# EAGLE board CT_schematic (EAGLE 7.6.0)

Size 100 x 80 mm. Coordinates in mm from the lower left corner, seen from the top.
Outline: 0,0 100,0 100,80 0,80 0,0
Copper layers (1*16): Top 0.035mm / dielectric 1.5mm / Bottom 0.035mm
Design rules "default": minimum track width 10mil, minimum drill 24mil, track to track 8mil, track to pad 8mil, pad to pad 8mil, via to via 8mil, smd to smd 8mil, copper to edge 40mil, drill to drill 8mil, minimum pad ring 10mil, minimum via ring 8mil, stop-mask expansion 4mil, vias tented up to drill 0mil, thermal gap 10mil

## Footprints (pad centres in the part's own frame; a part is rotated, then mirrored left to right if it is on the bottom)
C0603 = smd 0.8 x 0.8: 1 -0.762,0; 2 0.762,0
C0402 = smd 0.5 x 0.5: 1 -0.508,0; 2 0.508,0
C1210 = smd 1.2 x 2.5: 1 -1.524,0; 2 1.524,0
C0805 = smd 1.2 x 1.3: 1 -1.016,0; 2 1.016,0
R0603 = smd 0.8 x 0.8: 1 -0.762,0; 2 0.762,0
EXV-9H = smd 3.505 x 1.676: 1 -2.857,0; 2 2.857,0
L0603 = smd 0.8 x 0.8: 1 -0.762,0; 2 0.762,0
PJ-037B_PACKAGE = drill 3.7 square: 1 12,0 | drill 3.2 square: 2 6,0
EWLCSP66 = smd 0.27 x 0.27: A1 0,0; A2 0.4,0; A3 0.8,0; A4 1.2,0; A5 1.6,0; A6 2,0; A7 2.4,0; A8 2.8,0; A9 3.2,0; B1 0,-0.4; B2 0.4,-0.4; B3 0.8,-0.4; B4 1.2,-0.4; B5 1.6,-0.4; B6 2,-0.4; B7 2.4,-0.4; B8 2.8,-0.4; B9 3.2,-0.4; C1 0,-0.8; C2 0.4,-0.8; C3 0.8,-0.8; C7 2.4,-0.8; C8 2.8,-0.8; C9 3.2,-0.8; D1 0,-1.2; D2 0.4,-1.2; D3 0.8,-1.2; D7 2.4,-1.2; D8 2.8,-1.2; D9 3.2,-1.2; E1 0,-1.6; E2 0.4,-1.6; E3 0.8,-1.6; E7 2.4,-1.6; E8 2.8,-1.6; E9 3.2,-1.6; F1 0,-2; F2 0.4,-2; F3 0.8,-2; F7 2.4,-2; F8 2.8,-2; F9 3.2,-2; G1 0,-2.4; G2 0.4,-2.4; G3 0.8,-2.4; G7 2.4,-2.4; G8 2.8,-2.4; G9 3.2,-2.4; H1 0,-2.8; H2 0.4,-2.8; H3 0.8,-2.8; H4 1.2,-2.8; H5 1.6,-2.8; H6 2,-2.8; H7 2.4,-2.8; H8 2.8,-2.8; H9 3.2,-2.8; J1 0,-3.2; J2 0.4,-3.2; J3 0.8,-3.2; J4 1.2,-3.2; J5 1.6,-3.2; J6 2,-3.2; J7 2.4,-3.2; J8 2.8,-3.2; J9 3.2,-3.2
SOIC-8 = smd 1.6 x 0.6: 1 -2.7,1.905 | smd 1.55 x 0.6: 2 -2.7,0.635; 3 -2.7,-0.635; 4 -2.7,-1.905; 5 2.7,-1.905; 6 2.7,-0.635; 7 2.7,0.635; 8 2.7,1.905
SAMTEC_FTSH-105-01-L-DV-K = smd 0.762 x 2.794: 1 -2.54,-2.032; 2 -2.54,2.032; 3 -1.27,-2.032; 4 -1.27,2.032; 5 0,-2.032; 6 0,2.032; 7 1.27,-2.032; 8 1.27,2.032; 9 2.54,-2.032; 10 2.54,2.032
182-009-MALE = drill 1.194 pad 1.524 octagon: 1 -5.537,10.923; 2 -2.769,10.923; 3 0,10.923; 4 2.769,10.923; 5 5.537,10.923; 6 -4.153,8.08; 7 -1.384,8.08; 8 1.384,8.08; 9 4.153,8.08 | hole 3.048: -12.446,9.501; 12.446,9.501
QFN-24 = smd 0.7 x 0.305: 1 -1.815,1.25; 2 -1.815,0.75; 3 -1.815,0.25; 4 -1.815,-0.25; 5 -1.815,-0.73; 6 -1.815,-1.25; 13 1.815,-1.25; 14 1.815,-0.75; 15 1.815,-0.25; 16 1.815,0.25; 17 1.815,0.75; 18 1.815,1.25 | smd 0.305 x 0.7: 7 -1.25,-1.815; 8 -0.75,-1.815; 9 -0.25,-1.815; 10 0.25,-1.815; 11 0.75,-1.815; 12 1.25,-1.815; 19 1.25,1.815; 20 0.75,1.815; 21 0.25,1.815; 22 -0.25,1.815; 23 -0.75,1.815; 24 -1.25,1.815 | smd 2.591 x 2.591: 25 0,0
FCI_10118193-0001LF = smd 0.4 x 1.35: 1 -1.3,2.675; 2 -0.65,2.675; 3 0,2.675; 4 0.65,2.675; 5 1.3,2.675 | smd 1.6 x 1.4: 6 -3.2,2.45; 7 3.2,2.45 | smd 1.9 x 1.9: 8 -1.2,0; 9 1.2,0 | hole 0.5: -3.3,0; 3.3,0
SOT143B = smd 1 x 0.7: 1 -0.75,-1 | smd 0.6 x 0.7: 2 0.95,-1; 3 0.95,1; 4 -0.95,1
ASEK = smd 1.4 x 1: 1 -1.1,-0.8; 2 1.1,-0.8; 3 1.1,0.8; 4 -1.1,0.8
ASFL1 = smd 1.7 x 1.5: 1 -1.27,-1.1; 2 1.27,-1.1; 3 1.27,1.1; 4 -1.27,1.1
WSON-8 = smd 0.3 x 0.6: 1 -0.75,0; 2 0.05,0; 3 0.85,0; 4 1.65,0; 5 1.65,3.8; 6 0.85,3.8; 7 0.05,3.8; 8 -0.75,3.8 | smd 3 x 2.6: PAD 0.45,1.9
SON-6 = smd 0.55 x 0.3: 1 -0.355,0.5 | smd 0.52 x 0.3: 2 -0.37,0; 3 -0.37,-0.5; 4 0.37,-0.5; 5 0.37,0; 6 0.37,0.5
SW_4-1437565-2 = smd 1.4 x 2.1: 1 -2.23,4.55; 2 -2.23,-4.55; 3 2.23,4.55; 4 2.23,-4.55
LGM67K-G1J2-24-Z = smd 0.8 x 1.4: A -2,0; C 0,0
NC7SZ125M5X = smd 1.3 x 0.7: 1 -1.3,0.95; 2 -1.3,0; 3 -1.3,-0.95; 4 1.3,-0.95; 5 1.3,0.95

## Placement (x,y rotation side)
C1  1e-06  [C0603]  -22.86,77.47 0 top  (outside the outline)
C2  1e-07  [C0603]  -26.67,77.47 0 top  (outside the outline)
C3  1e-07  [C0603]  -30.48,77.47 0 top  (outside the outline)
C4  1e-07  [C0603]  -34.29,77.47 0 top  (outside the outline)
C5  1e-07  [C0603]  -38.1,77.47 0 top  (outside the outline)
C6  1e-07  [C0603]  -41.91,77.47 0 top  (outside the outline)
C7  4.7e-06  [C0603]  -15.24,77.47 0 top  (outside the outline)
C8  1e-08  [C0603]  -45.72,77.47 0 top  (outside the outline)
C9  1e-06  [C0603]  -49.53,77.47 0 top  (outside the outline)
C10  1e-07  [C0402]  -38.1,82.55 0 top  (outside the outline)
C11  1e-07  [C0402]  -41.91,82.55 0 top  (outside the outline)
C12  1e-08  [C0402]  -45.72,82.55 0 top  (outside the outline)
C13  1e-07  [C0402]  -49.53,82.55 0 top  (outside the outline)
C14  1e-07  [C0402]  -53.34,82.55 0 top  (outside the outline)
C15  1e-08  [C0402]  -57.15,82.55 0 top  (outside the outline)
C16  2.2e-06  [C0603]  -19.05,77.47 0 top  (outside the outline)
C17  1e-08  [C0402]  -60.96,82.55 0 top  (outside the outline)
C18  1e-08  [C0402]  -64.77,82.55 0 top  (outside the outline)
C19  1e-06  [C0603]  -53.34,77.47 0 top  (outside the outline)
C20  1e-08  [C0402]  -68.58,82.55 0 top  (outside the outline)
C21  1e-08  [C0402]  -72.39,82.55 0 top  (outside the outline)
C22  1e-08  [C0402]  -76.2,82.55 0 top  (outside the outline)
C23  1e-08  [C0402]  -80.01,82.55 0 top  (outside the outline)
C24  1e-05  [C1210]  -78.74,58.42 0 top  (outside the outline)
C25  1e-05  [C0805]  -46.99,66.04 0 top  (outside the outline)
C26  8e-07  [R0603]  -57.15,77.47 0 top  (outside the outline)
C27  1e-05  [C0805]  -52.07,66.04 0 top  (outside the outline)
C28  1e-08  [C0402]  -15.24,87.63 0 top  (outside the outline)
C29  1e-05  [C1210]  -16.51,67.31 0 top  (outside the outline)
C30  1e-05  [C1210]  -22.86,67.31 0 top  (outside the outline)
C31  1e-07  [C0402]  -19.05,87.63 0 top  (outside the outline)
C32  0.0001  [EXV-9H]  -38.1,59.69 0 top  (outside the outline)
C33  0.0001  [EXV-9H]  -49.53,59.69 0 top  (outside the outline)
C34  1e-08  [C0402]  -22.86,87.63 0 top  (outside the outline)
C35  1e-08  [C0402]  -26.67,87.63 0 top  (outside the outline)
C36  1e-08  [C0402]  -30.48,87.63 0 top  (outside the outline)
F1  240.0  [L0603]  -60.96,77.47 0 top  (outside the outline)
J1  PJ-037B  [PJ-037B_PACKAGE]  -27.94,29.21 0 top  (outside the outline)
R2  1000.0  [R0603]  -64.77,77.47 0 top  (outside the outline)
R4  4700.0  [R0603]  -68.58,77.47 0 top  (outside the outline)
R5  4700.0  [R0603]  -72.39,77.47 0 top  (outside the outline)
R6  10000.0  [R0603]  -25.4,72.39 0 top  (outside the outline)
R7  10000.0  [R0603]  -30.48,72.39 0 top  (outside the outline)
R8  10000.0  [R0603]  -35.56,72.39 0 top  (outside the outline)
R9  10000.0  [R0603]  -40.64,72.39 0 top  (outside the outline)
R10  10000.0  [R0603]  -45.72,72.39 0 top  (outside the outline)
R11  10000.0  [R0603]  -50.8,72.39 0 top  (outside the outline)
R12  10000.0  [R0603]  -55.88,72.39 0 top  (outside the outline)
R13  10000.0  [R0603]  -60.96,72.39 0 top  (outside the outline)
R14  10000.0  [R0603]  -66.04,72.39 0 top  (outside the outline)
R15  5.0  [R0603]  -76.2,77.47 0 top  (outside the outline)
R16  120.0  [R0603]  -80.01,77.47 0 top  (outside the outline)
R17  470000.0  [R0603]  -57.15,66.04 0 top  (outside the outline)
R18  8060.0  [R0603]  -15.24,82.55 0 top  (outside the outline)
R19  100000.0  [R0603]  -62.23,66.04 0 top  (outside the outline)
R20  200.0  [R0603]  -19.05,82.55 0 top  (outside the outline)
R21  1000.0  [R0603]  -22.86,82.55 0 top  (outside the outline)
R22  100000.0  [R0603]  -67.31,66.04 0 top  (outside the outline)
R23  36000.0  [R0603]  -71.12,72.39 0 top  (outside the outline)
R24  100000.0  [R0603]  -72.39,66.04 0 top  (outside the outline)
R25  100000.0  [R0603]  -77.47,66.04 0 top  (outside the outline)
R26  2231.0  [R0603]  -26.67,82.55 0 top  (outside the outline)
R27  1000.0  [R0603]  -30.48,82.55 0 top  (outside the outline)
R28  10000.0  [R0603]  -76.2,72.39 0 top  (outside the outline)
R29  10000.0  [R0603]  -81.28,72.39 0 top  (outside the outline)
R30  9100.0  [R0603]  -34.29,82.55 0 top  (outside the outline)
R31  680000.0  [R0603]  -15.24,72.39 0 top  (outside the outline)
R32  120000.0  [R0603]  -20.32,72.39 0 top  (outside the outline)
U1  STM32F205RGE6  [EWLCSP66]  -71.12,52.07 0 top  (outside the outline)
U2  AT25010B-SSHL-T  [SOIC-8]  -60.96,27.94 0 top  (outside the outline)
U3  FTSH-105-01-L-DV-K  [SAMTEC_FTSH-105-01-L-DV-K]  -76.2,7.62 0 top  (outside the outline)
U4  SN65HVD230D  [SOIC-8]  -74.93,27.94 0 top  (outside the outline)
U5  182-009-113R531  [182-009-MALE]  -36.83,6.35 0 top  (outside the outline)
U6  USB3317C-CP-TR  [QFN-24]  -71.12,58.42 0 top  (outside the outline)
U7  10118193-0001LF  [FCI_10118193-0001LF]  -52.07,49.53 0 top  (outside the outline)
U8  prtr5v0u2ax  [SOT143B]  -43.18,87.63 0 top  (outside the outline)
U9  ASEK-32.768KHz-ECST  [ASEK]  -29.21,59.69 0 top  (outside the outline)
U10  ASFL1-25MHZ-NCS  [ASFL1]  -26.67,50.8 0 top  (outside the outline)
U11  ASFL1-26MHZ-NCS  [ASFL1]  -43.18,50.8 0 top  (outside the outline)
U12  LP3878SDX-ADJ/NOPB  [WSON-8]  -30.48,39.37 0 top  (outside the outline)
U13  LP2951ACSDX/NOPB  [WSON-8]  -68.58,39.37 0 top  (outside the outline)
U14  LP3878SDX-ADJ/NOPB  [WSON-8]  -50.8,39.37 0 top  (outside the outline)
U15  TPS3895ADRYR  [SON-6]  -46.99,86.36 0 top  (outside the outline)
U16  4-1437565-2  [SW_4-1437565-2]  -44.45,27.94 0 top  (outside the outline)
U17  Q65110A2395  [LGM67K-G1J2-24-Z]  -59.69,58.42 0 top  (outside the outline)
U18  nc7sz125m5x  [NC7SZ125M5X]  -27.94,66.04 0 top  (outside the outline)
U19  nc7sz125m5x  [NC7SZ125M5X]  -34.29,66.04 0 top  (outside the outline)
U20  nc7sz125m5x  [NC7SZ125M5X]  -40.64,66.04 0 top  (outside the outline)

## Library data of the parts
C1-C36 F1 J1 R2 R4-R32 U1-U20 = circuit_tree

## Nets
CLK_U1_B9: U1.B9 U9.3
CLK_U1_E9: U1.E9 U10.3
CLK_U6_23: U6.23 U11.3
GND: C1.2 C2.2 C3.2 C4.2 C5.2 C6.2 C7.2 C8.2 C9.2 C10.2 C11.2 C12.2 C13.2 C14.2 C15.2 C16.2 C17.2 C18.2 C19.2 C20.2 C21.2 C22.2 C23.2 C24.2 C25.2 C26.2 C27.2 C28.2 C29.2 C30.2 C31.2 C32.2 C33.2 C34.2 C35.2 C36.2 J1.2 R2.2 R6.2 R7.2 R15.2 R17.2 R18.2 R21.2 R24.2 R27.2 R30.2 R32.2 U1.B1 U1.D8 U1.F1 U1.H9 U2.4 U3.3 U3.5 U4.2 U5.5 U6.25 U7.5 U7.6 U7.7 U7.8 U7.9 U8.1 U9.2 U10.2 U11.2 U12.3 U12.PAD U13.3 U13.4 U13.PAD U14.3 U14.PAD U15.2 U17.C U18.2 U18.3 U19.1 U19.3 U20.1 U20.3
NET_U1_B6: R6.1 U1.B6
NET_U1_C2: C11.1 U1.C2
NET_U1_C8: R8.1 U1.C8
NET_U1_E8: R4.1 U1.E8 U19.4
NET_U1_F7: C8.1 C9.1 F1.1 U1.F7
NET_U1_H7: R7.1 U1.H7
NET_U1_J8: U17.A
NET_U1_J9: U16.3 U16.4
NET_U2_3: R9.1 U2.3
NET_U2_7: R11.1 U2.7
NET_U3_9: R15.1 U3.9
NET_U4_6: R16.2 U4.6
NET_U4_8: R17.1 U4.8
NET_U5_2: R16.2 U4.6 U5.2
NET_U5_3: R16.1 U4.7 U5.3
NET_U6_4: C16.1 U6.4
NET_U6_22: R5.1 U6.22 U20.4
NET_U6_24: R18.1 U6.24
NET_U7_1: C19.1 U6.2 U7.1 U8.4
NET_U7_2: U6.5 U7.2 U8.3
NET_U7_3: U6.6 U7.3 U8.2
NET_U12_1: C23.1 U12.1
NET_U12_6: R20.2 R21.1 U12.6
NET_U12_8: R19.1 U12.8
NET_U13_5: R22.1 U13.5
NET_U13_7: R23.2 R24.1 U13.7
NET_U14_1: C28.1 U14.1
NET_U14_6: R26.2 R27.1 U14.6
NET_U14_8: R25.1 U14.8
NET_U15_1: R29.1 R30.1 U15.1
NET_U15_3: R31.2 R32.1 U15.3
NET_U15_4: R28.1 U15.4 U18.4 U19.2 U20.2
NET_U16_1: R2.1 U16.1 U16.2
PROC_CAN1_RX: U1.B7 U4.4
PROC_CAN1_TX: U1.A7 U4.1
PROC_SPI3_MISO: U1.B4 U2.2
PROC_SPI3_MOSI: U1.A3 U2.5
PROC_SPI3_NSS: R10.1 U1.A2 U2.1
PROC_SPI3_SCK: U1.B3 U2.6
PROC_SYS_JTCK_SWCLK: R13.1 U1.A1 U3.4
PROC_SYS_JTDO_SWO: U1.A4 U3.6
PROC_SYS_JTMS_SWDIO: R14.1 U1.B2 U3.2
PROC_USB_OTG_HS_ULPI_CK: U1.H6 U6.12
PROC_USB_OTG_HS_ULPI_D0: U1.G7 U6.16
PROC_USB_OTG_HS_ULPI_D1: U1.J6 U6.15
PROC_USB_OTG_HS_ULPI_D2: U1.J5 U6.14
PROC_USB_OTG_HS_ULPI_D3: U1.H3 U6.13
PROC_USB_OTG_HS_ULPI_D4: U1.J2 U6.11
PROC_USB_OTG_HS_ULPI_D5: U1.J1 U6.10
PROC_USB_OTG_HS_ULPI_D6: U1.H2 U6.9
PROC_USB_OTG_HS_ULPI_D7: U1.A5 U6.8
PROC_USB_OTG_HS_ULPI_DIR: U1.D7 U6.19
PROC_USB_OTG_HS_ULPI_NXT: U1.G8 U6.18
PROC_USB_OTG_HS_ULPI_STP: U1.G9 U6.20
RST_OUT_U3_JTAG_RST_B: R12.1 U3.10 U18.1
VCC_S1_12V2: C24.1 C26.1 C29.1 C32.1 C33.1 J1.1 R19.2 R25.2 U12.4 U13.8 U14.4
VCC_TIER1_1V2: C10.1 C25.1 R20.1 U1.J3 U12.5
VCC_TIER1_1V8: C18.1 C27.1 C34.1 C35.1 C36.1 R22.2 R23.1 U6.21 U13.1 U18.5 U19.5 U20.5
VCC_TIER1_3V3: C1.1 C2.1 C3.1 C4.1 C5.1 C6.1 C7.1 C12.1 C13.1 C14.1 C15.1 C17.1 C20.1 C21.1 C22.1 C30.1 C31.1 F1.2 R4.2 R5.2 R8.2 R9.2 R10.2 R11.2 R12.2 R13.2 R14.2 R26.1 R28.2 R29.2 R31.1 U1.A8 U1.A9 U1.D9 U1.E1 U2.8 U3.1 U4.3 U6.3 U6.17 U9.4 U10.4 U11.4 U14.5 U15.6

## Tracks (layer width: path | path; a pad name or v marks a point on that pad's centre or on a via)
CLK_U1_B9  (1 unrouted)
CLK_U1_E9  (1 unrouted)
CLK_U6_23  (1 unrouted)
GND  (81 unrouted)
NET_U1_B6  (1 unrouted)
NET_U1_C2  (1 unrouted)
NET_U1_C8  (1 unrouted)
NET_U1_E8  (2 unrouted)
NET_U1_F7  (3 unrouted)
NET_U1_H7  (1 unrouted)
NET_U1_J9  (1 unrouted)
NET_U2_3  (1 unrouted)
NET_U2_7  (1 unrouted)
NET_U3_9  (1 unrouted)
NET_U4_6  (1 unrouted)
NET_U4_8  (1 unrouted)
NET_U5_2  (2 unrouted)
NET_U5_3  (2 unrouted)
NET_U6_4  (1 unrouted)
NET_U6_22  (2 unrouted)
NET_U6_24  (1 unrouted)
NET_U7_1  (3 unrouted)
NET_U7_2  (2 unrouted)
NET_U7_3  (2 unrouted)
NET_U12_1  (1 unrouted)
NET_U12_6  (2 unrouted)
NET_U12_8  (1 unrouted)
NET_U13_5  (1 unrouted)
NET_U13_7  (2 unrouted)
NET_U14_1  (1 unrouted)
NET_U14_6  (2 unrouted)
NET_U14_8  (1 unrouted)
NET_U15_1  (2 unrouted)
NET_U15_3  (2 unrouted)
NET_U15_4  (4 unrouted)
NET_U16_1  (2 unrouted)
PROC_CAN1_RX  (1 unrouted)
PROC_CAN1_TX  (1 unrouted)
PROC_SPI3_MISO  (1 unrouted)
PROC_SPI3_MOSI  (1 unrouted)
PROC_SPI3_NSS  (2 unrouted)
PROC_SPI3_SCK  (1 unrouted)
PROC_SYS_JTCK_SWCLK  (2 unrouted)
PROC_SYS_JTDO_SWO  (1 unrouted)
PROC_SYS_JTMS_SWDIO  (2 unrouted)
PROC_USB_OTG_HS_ULPI_CK  (1 unrouted)
PROC_USB_OTG_HS_ULPI_D0  (1 unrouted)
PROC_USB_OTG_HS_ULPI_D1  (1 unrouted)
PROC_USB_OTG_HS_ULPI_D2  (1 unrouted)
PROC_USB_OTG_HS_ULPI_D3  (1 unrouted)
PROC_USB_OTG_HS_ULPI_D4  (1 unrouted)
PROC_USB_OTG_HS_ULPI_D5  (1 unrouted)
PROC_USB_OTG_HS_ULPI_D6  (1 unrouted)
PROC_USB_OTG_HS_ULPI_D7  (1 unrouted)
PROC_USB_OTG_HS_ULPI_DIR  (1 unrouted)
PROC_USB_OTG_HS_ULPI_NXT  (1 unrouted)
PROC_USB_OTG_HS_ULPI_STP  (1 unrouted)
RST_OUT_U3_JTAG_RST_B  (2 unrouted)
VCC_S1_12V2  (10 unrouted)
VCC_TIER1_1V2  (4 unrouted)
VCC_TIER1_1V8  (11 unrouted)
VCC_TIER1_3V3  (44 unrouted)